# EAGLE board some other arrangement (EAGLE 6.5.0)
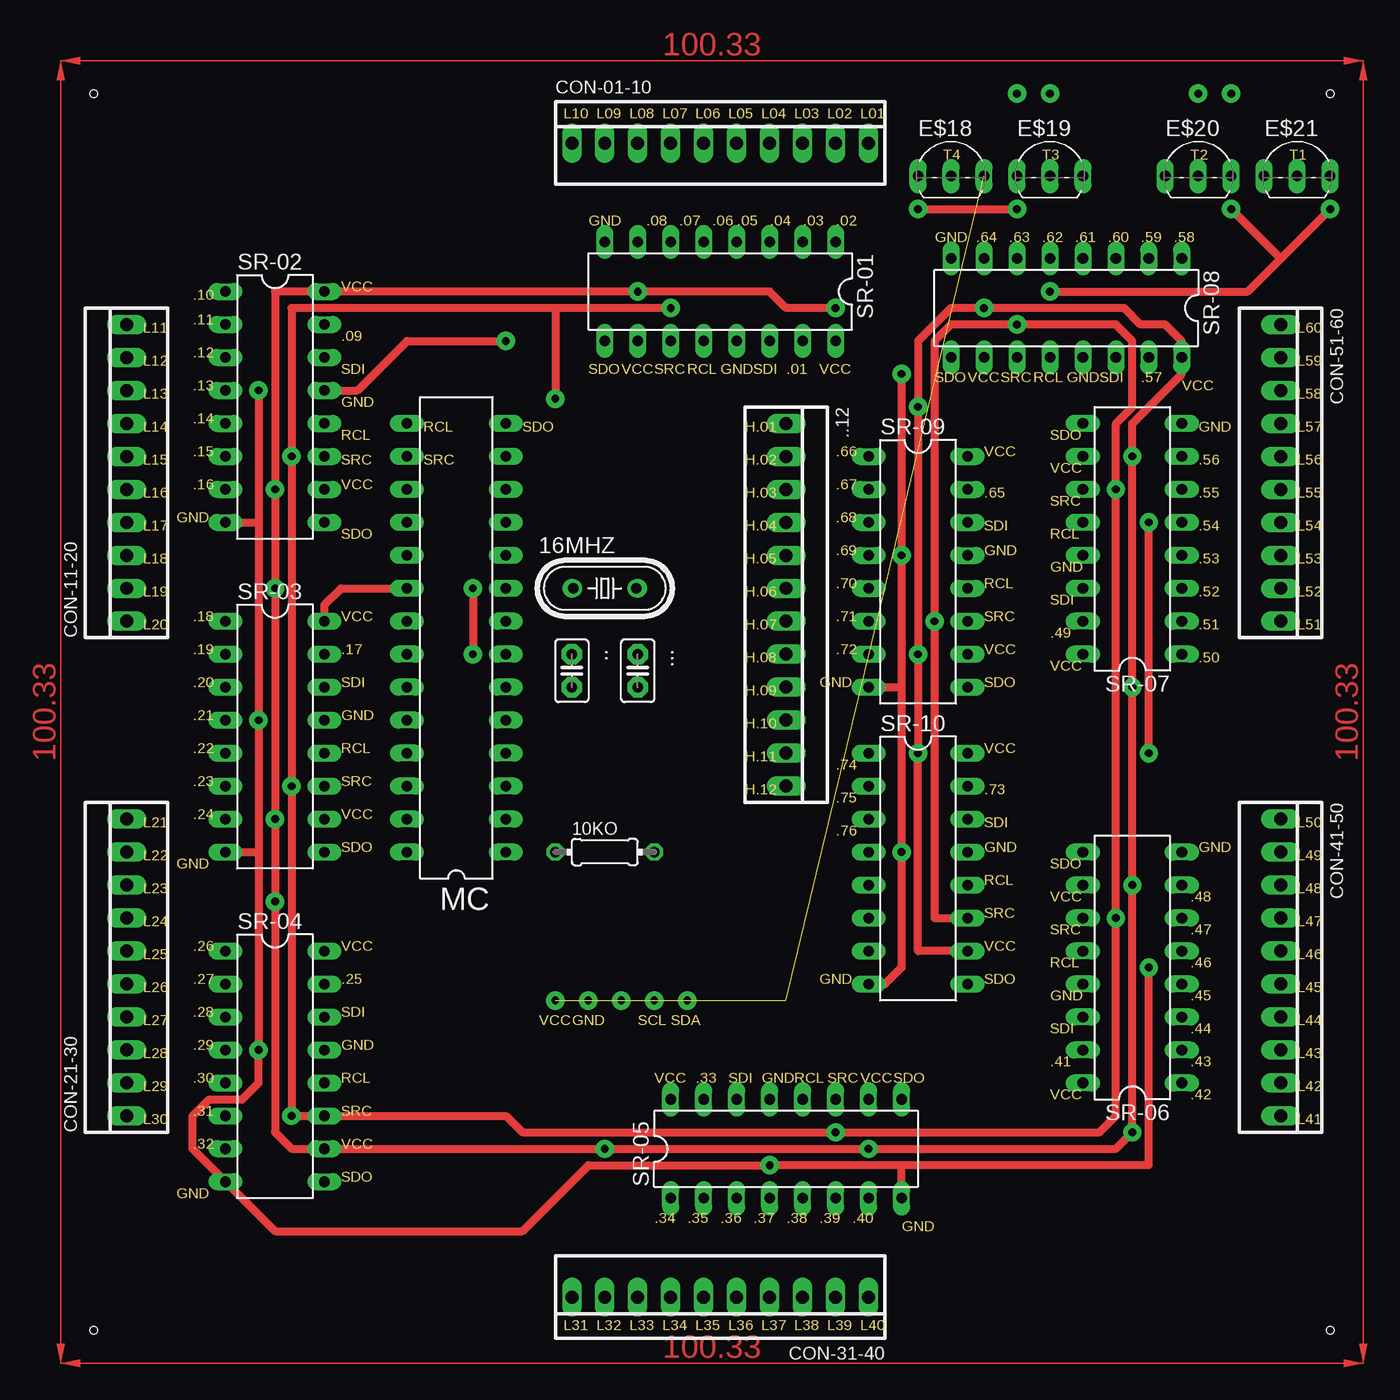
[diagram p0: board, top side]
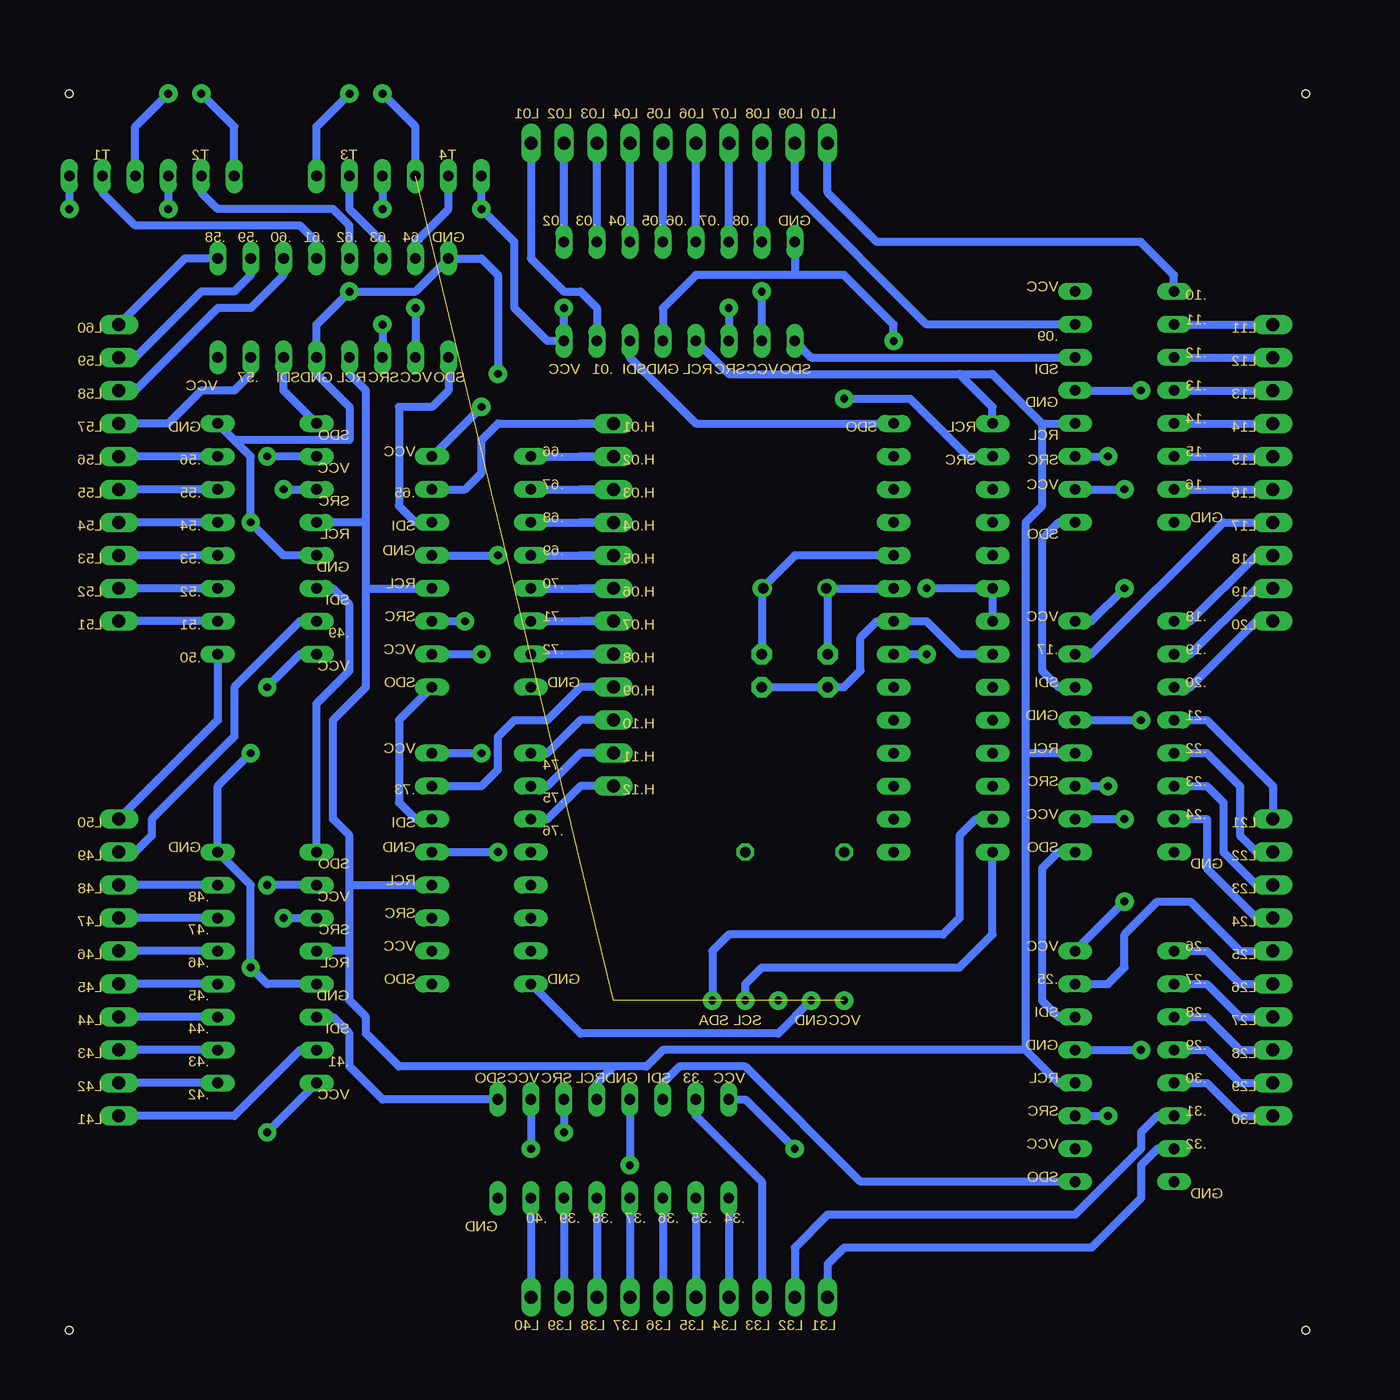
[diagram p1: board, bottom side, seen from below]

No outline drawn. Coordinates in mm, seen from the top.
Copper layers (1*16): Top 0.035mm / dielectric 1.5mm / Bottom 0.035mm
Design rules "default": minimum track width 10mil, minimum drill 24mil, track to track 8mil, track to pad 8mil, pad to pad 8mil, via to via 8mil, smd to smd 8mil, copper to edge 40mil, drill to drill 8mil, minimum pad ring 10mil, minimum via ring 8mil, stop-mask expansion 4mil, vias tented up to drill 0mil, thermal gap 10mil
Holes 0.6 mm at 2.54,2.54 97.79,2.54 97.79,97.79 2.54,97.79

## Footprints (pad centres in the part's own frame; a part is rotated, then mirrored left to right if it is on the bottom)
0204/7 = drill 0.813 octagon: 1 -3.81,0; 2 3.81,0
HC49/S = drill 0.813: 1 -2.413,0; 2 2.413,0
C2.5-2 = drill 0.813 pad 1.6 octagon: 1 -1.27,0; 2 1.27,0
22-23-2121 = drill 1 long: 1 -13.97,0; 2 -11.43,0; 3 -8.89,0; 4 -6.35,0; 5 -3.81,0; 6 -1.27,0; 7 1.27,0; 8 3.81,0; 9 6.35,0; 10 8.89,0; 11 11.43,0; 12 13.97,0
22-23-2101 = drill 1 long: 1 -11.43,0; 2 -8.89,0; 3 -6.35,0; 4 -3.81,0; 5 -1.27,0; 6 1.27,0; 7 3.81,0; 8 6.35,0; 9 8.89,0; 10 11.43,0
TO92-BCE = drill 0.813 long: B 2.54,0; C 0,0; E -2.54,0
DIL28-3 = drill 0.813 long: 1 -16.51,-3.81; 2 -13.97,-3.81; 3 -11.43,-3.81; 4 -8.89,-3.81; 5 -6.35,-3.81; 6 -3.81,-3.81; 7 -1.27,-3.81; 8 1.27,-3.81; 9 3.81,-3.81; 10 6.35,-3.81; 11 8.89,-3.81; 12 11.43,-3.81; 13 13.97,-3.81; 14 16.51,-3.81; 15 16.51,3.81; 16 13.97,3.81; 17 11.43,3.81; 18 8.89,3.81; 19 6.35,3.81; 20 3.81,3.81; 21 1.27,3.81; 22 -1.27,3.81; 23 -3.81,3.81; 24 -6.35,3.81; 25 -8.89,3.81; 26 -11.43,3.81; 27 -13.97,3.81; 28 -16.51,3.81
DIL16 = drill 0.813 long: 1 -8.89,-3.81; 2 -6.35,-3.81; 3 -3.81,-3.81; 4 -1.27,-3.81; 5 1.27,-3.81; 6 3.81,-3.81; 7 6.35,-3.81; 8 8.89,-3.81; 9 8.89,3.81; 10 6.35,3.81; 11 3.81,3.81; 12 1.27,3.81; 13 -1.27,3.81; 14 -3.81,3.81; 15 -6.35,3.81; 16 -8.89,3.81

## Placement (x,y rotation side)
10KO  [0204/7]  41.91,39.37 0 top
16MHZ  [HC49/S]  41.91,59.69 0 top
..  22 pF  [C2.5-2]  39.37,53.34 270 top
..12  [22-23-2121]  55.88,58.42 270 top
...  22 pF  [C2.5-2]  44.45,53.34 270 top
CON-01-10  [22-23-2101]  50.8,93.98 0 top
CON-11-20  [22-23-2101]  5.08,68.58 90 top
CON-21-30  [22-23-2101]  5.08,30.48 90 top
CON-31-40  [22-23-2101]  50.8,5.08 180 top
CON-41-50  [22-23-2101]  93.98,30.48 270 top
CON-51-60  [22-23-2101]  93.98,68.58 270 top
E$18  [TO92-BCE]  68.58,91.44 0 top
E$19  [TO92-BCE]  76.2,91.44 0 top
E$20  [TO92-BCE]  87.63,91.44 0 top
E$21  [TO92-BCE]  95.25,91.44 0 top
MC  [DIL28-3]  30.48,55.88 90 top
SR-01  [DIL16]  50.8,82.55 180 top
SR-02  [DIL16]  16.51,73.66 270 top
SR-03  [DIL16]  16.51,48.26 270 top
SR-04  [DIL16]  16.51,22.86 270 top
SR-05  [DIL16]  55.88,16.51 0 top
SR-06  [DIL16]  82.55,30.48 90 top
SR-07  [DIL16]  82.55,63.5 90 top
SR-08  [DIL16]  77.47,81.28 180 top
SR-09  [DIL16]  66.04,60.96 270 top
SR-10  [DIL16]  66.04,38.1 270 top

## Library data of the parts
10KO = resistor
16MHZ = crystal
.. ... = capacitor-wima
..12 CON-01-10 CON-11-20 CON-21-30 CON-31-40 CON-41-50 CON-51-60 = con-molex
E$18-E$21 = transistor-npn
MC = atmel
SR-01-SR-09 SR-10 = 74xx-eu

## Nets
S$1: CON-01-10.10 SR-01.15
S$2: CON-01-10.9 SR-01.1
S$3: CON-01-10.8 SR-01.2
S$4: CON-01-10.7 SR-01.3
S$5: CON-01-10.6 SR-01.4
S$6: CON-01-10.5 SR-01.5
S$7: CON-01-10.4 SR-01.6
S$8: CON-01-10.3 SR-01.7
S$9: CON-01-10.2 SR-02.15
S$10: CON-01-10.1 SR-02.1
S$11: CON-11-20.10 SR-02.2
S$12: CON-11-20.9 SR-02.3
S$13: CON-11-20.8 SR-02.4
S$14: CON-11-20.7 SR-02.5
S$15: CON-11-20.6 SR-02.6
S$16: CON-11-20.5 SR-02.7
S$17: CON-11-20.4 SR-03.15
S$18: CON-11-20.3 SR-03.1
S$19: CON-11-20.2 SR-03.2
S$20: CON-11-20.1 SR-03.3
S$21: CON-21-30.10 SR-03.4
S$22: CON-21-30.9 SR-03.5
S$23: CON-21-30.8 SR-03.6
S$24: CON-21-30.7 SR-03.7
S$25: CON-21-30.6 SR-04.15
S$26: CON-21-30.5 SR-04.1
S$27: CON-21-30.4 SR-04.2
S$28: CON-21-30.3 SR-04.3
S$29: CON-21-30.2 SR-04.4
S$30: CON-21-30.1 SR-04.5
S$31: CON-31-40.9 SR-04.6
S$32: CON-31-40.10 SR-04.7
S$33: CON-31-40.8 SR-05.15
S$34: CON-31-40.7 SR-05.1
S$35: CON-31-40.6 SR-05.2
S$36: CON-31-40.5 SR-05.3
S$37: CON-31-40.4 SR-05.4
S$38: CON-31-40.3 SR-05.5
S$39: CON-31-40.2 SR-05.6
S$40: CON-31-40.1 SR-05.7
S$41: CON-41-50.10 SR-06.15
S$42: CON-41-50.9 SR-06.1
S$43: CON-41-50.8 SR-06.2
S$44: CON-41-50.7 SR-06.3
S$45: CON-41-50.6 SR-06.4
S$46: CON-41-50.5 SR-06.5
S$47: CON-41-50.4 SR-06.6
S$48: CON-41-50.3 SR-06.7
S$49: E$18.E E$19.E MC.7 MC.20 MC.21 SR-01.10 SR-01.16 SR-02.10 SR-02.16 SR-03.10 SR-03.16 SR-04.16 SR-05.10 SR-05.16 SR-06.10 SR-06.16 SR-07.10 SR-07.16 SR-08.10 SR-09.10 SR-09.16 SR-10.10 SR-10.16
S$50: CON-41-50.1 SR-07.1
S$51: CON-51-60.10 SR-07.2
S$52: CON-51-60.9 SR-07.3
S$53: CON-51-60.8 SR-07.4
S$54: CON-51-60.7 SR-07.5
S$55: CON-51-60.6 SR-07.6
S$56: CON-51-60.5 SR-07.7
S$57: CON-51-60.4 SR-08.15
S$58: CON-51-60.1 SR-08.1
S$59: CON-51-60.2 SR-08.2
S$60: CON-51-60.3 SR-08.3
S$61: SR-09.15
S$62: E$18.C SR-08.7
S$63: ..12.10 SR-10.1
S$64: SR-05.9 SR-06.14
S$65: SR-01.9 SR-02.14
S$66: SR-09.1
S$67: SR-09.2
S$68: SR-09.3
S$69: SR-09.4
S$70: SR-09.5
S$71: SR-09.6
S$73: SR-02.9 SR-03.14
S$74: SR-03.9 SR-04.14
S$75: SR-04.9 SR-05.14
S$76: SR-06.9 SR-07.14
S$77: SR-07.9 SR-08.14
S$78: SR-08.9 SR-09.14
S$79: SR-09.9 SR-10.14
S$80: MC.15 SR-02.12 SR-03.12 SR-04.12 SR-05.12 SR-06.12 SR-07.12 SR-08.12 SR-09.12 SR-10.12
S$81: MC.16 SR-01.11 SR-02.11 SR-03.11 SR-04.11 SR-05.11 SR-06.11 SR-07.11 SR-08.11 SR-09.11 SR-10.11
S$84: E$19.C SR-08.6
S$86: E$20.C SR-08.5
S$88: E$21.C SR-08.4
S$89: ..12.11 SR-10.2
S$90: ..12.12 SR-10.3
S$91: SR-01.8 SR-01.13
S$93: SR-02.8 SR-03.13
S$94: CON-41-50.2 SR-07.15
S$96: E$19.B
S$98: E$20.E
S$99: E$21.E
S$100: ..12.9 SR-10.15
S$101: SR-02.13
S$103: SR-09.7
S$104: ...1 MC.9
S$105: ....1 MC.10
S$106: ...2 ....2 MC.8 MC.22
S$107: E$18.B E$20.B E$21.B MC.27 MC.28 SR-03.8 SR-04.8 SR-04.13 SR-05.8 SR-05.13 SR-06.8 SR-06.13 SR-07.8 SR-07.13 SR-08.8 SR-08.13 SR-09.8 SR-09.13 SR-10.8 SR-10.13
S$108: MC.14 SR-01.14

## Tracks (layer width: path | path; a pad name or v marks a point on that pad's centre or on a via)
S$1
  Bottom 0.61: CON-01-10.10 62.23,85.09 59.69,82.55 58.42,82.55 57.15,81.28 SR-01.15
S$2
  Bottom 0.61: SR-01.1 CON-01-10.9
S$3
  Bottom 0.61: SR-01.2 CON-01-10.8
S$4
  Bottom 0.61: SR-01.3 CON-01-10.7
S$5
  Bottom 0.61: SR-01.4 CON-01-10.6
S$6
  Bottom 0.61: SR-01.5 CON-01-10.5
S$7
  Bottom 0.61: SR-01.6 CON-01-10.4
S$8
  Bottom 0.61: SR-01.7 CON-01-10.3
S$9
  Bottom 0.61: SR-02.15 31.75,80.01 41.91,90.17 CON-01-10.2
S$10
  Bottom 0.61: SR-02.1 12.7,83.82 15.24,86.36 35.56,86.36 39.37,90.17 CON-01-10.1
S$11
  Bottom 0.61: SR-02.2 CON-11-20.10
S$12
  Bottom 0.61: SR-02.3 CON-11-20.9
S$13
  Bottom 0.61: SR-02.4 CON-11-20.8
S$14
  Bottom 0.61: SR-02.5 CON-11-20.7
S$15
  Bottom 0.61: SR-02.6 CON-11-20.6
S$16
  Bottom 0.61: SR-02.7 CON-11-20.5
S$17
  Bottom 0.61: SR-03.15 19.05,54.61 8.89,64.77 CON-11-20.4
S$18
  Bottom 0.61: SR-03.1 11.43,57.15 6.35,62.23 CON-11-20.3
S$19
  Bottom 0.61: SR-03.2 11.43,54.61 6.35,59.69 CON-11-20.2
S$20
  Bottom 0.61: SR-03.3 11.43,52.07 6.35,57.15 CON-11-20.1
S$21
  Bottom 0.61: SR-03.4 10.16,49.53 5.08,44.45 CON-21-30.10
S$22
  Bottom 0.61: SR-03.5 10.16,46.99 7.62,44.45 7.62,40.64 6.35,39.37 CON-21-30.9
S$23
  Bottom 0.61: SR-03.6 10.16,44.45 8.89,43.18 8.89,39.37 6.35,36.83 CON-21-30.8
S$24
  Bottom 0.61: SR-03.7 10.16,41.91 10.16,38.1 6.35,34.29 CON-21-30.7
S$25
  Bottom 0.61: SR-04.15 17.78,29.21 16.51,30.48 16.51,33.02 13.97,35.56 11.43,35.56 7.62,31.75 CON-21-30.6
S$26
  Bottom 0.61: SR-04.1 10.16,31.75 7.62,29.21 CON-21-30.5
S$27
  Bottom 0.61: SR-04.2 10.16,29.21 7.62,26.67 CON-21-30.4
S$28
  Bottom 0.61: SR-04.3 10.16,26.67 7.62,24.13 CON-21-30.3
S$29
  Bottom 0.61: SR-04.4 10.16,24.13 7.62,21.59 CON-21-30.2
S$30
  Bottom 0.61: SR-04.5 10.16,21.59 7.62,19.05 CON-21-30.1
S$31
  Bottom 0.61: SR-04.6 13.97,19.05 15.24,17.78 15.24,16.51 20.32,11.43 39.37,11.43 41.91,8.89 CON-31-40.9
S$32
  Bottom 0.61: SR-04.7 13.97,16.51 15.24,15.24 15.24,12.7 19.05,8.89 38.1,8.89 39.37,7.62 CON-31-40.10
S$33
  Bottom 0.61: SR-05.15 49.53,19.05 44.45,13.97 CON-31-40.8
S$34
  Bottom 0.61: SR-05.1 CON-31-40.7
S$35
  Bottom 0.61: SR-05.2 CON-31-40.6
S$36
  Bottom 0.61: SR-05.3 CON-31-40.5
S$37
  Bottom 0.61: SR-05.4 CON-31-40.4
S$38
  Bottom 0.61: SR-05.5 CON-31-40.3
S$39
  Bottom 0.61: SR-05.6 CON-31-40.2
S$40
  Bottom 0.61: SR-05.7 CON-31-40.1
S$41
  Bottom 0.61: SR-06.15 80.01,24.13 85.09,19.05 CON-41-50.10
S$42
  Bottom 0.61: SR-06.1 CON-41-50.9
S$43
  Bottom 0.61: SR-06.2 CON-41-50.8
S$44
  Bottom 0.61: SR-06.3 CON-41-50.7
S$45
  Bottom 0.61: SR-06.4 CON-41-50.6
S$46
  Bottom 0.61: SR-06.5 CON-41-50.5
S$47
  Bottom 0.61: SR-06.6 CON-41-50.4
S$48
  Bottom 0.61: SR-06.7 CON-41-50.3
S$49  (via drill 0.6 pad 1.42)
  Top 0.61: v59.69,81.28 55.88,81.28 54.61,82.55 v44.45,82.55 SR-02.16 16.51,82.55 v16.51,67.31 v16.51,59.69 v16.51,41.91 v16.51,35.56 16.51,17.78 17.78,16.51 v41.91,16.51 v62.23,16.51 81.28,16.51 v82.55,17.78 v82.55,36.83 v82.55,52.07 v82.55,69.85 82.55,72.39 86.36,76.2 86.36,78.74 85.09,80.01 83.19,80.01 81.92,81.28 v71.12,81.28 68.58,81.28 66.04,78.74 v66.04,73.66 v66.04,54.61 v66.04,46.99 66.04,31.75 SR-10.10 | v66.04,88.9 v73.66,88.9 | SR-03.16 20.32,58.42 21.59,59.69 MC.20 | v31.75,59.69 v31.75,54.61
  Bottom 0.61: v59.69,81.28 SR-01.16 60.96,78.74 63.5,81.28 63.5,86.36 v66.04,88.9 E$18.E | SR-01.10 v44.45,82.55 | SR-02.10 v16.51,67.31 | SR-03.16 19.05,57.15 v16.51,59.69 | SR-03.10 v16.51,41.91 | SR-04.16 v16.51,35.56 | SR-05.16 45.72,20.32 v41.91,16.51 | SR-05.10 v62.23,16.51 | SR-06.16 v82.55,17.78 | SR-06.10 v82.55,36.83 | SR-07.16 80.01,54.61 v82.55,52.07 | SR-07.10 v82.55,69.85 | v71.12,81.28 SR-08.10 | SR-09.16 v66.04,73.66 | SR-09.10 v66.04,54.61 | SR-10.16 v66.04,46.99 | E$19.E v73.66,88.9 | MC.21 MC.20 v31.75,59.69 | MC.7 v31.75,54.61
S$50
  Bottom 0.61: SR-07.1 86.36,49.53 CON-41-50.1
S$51
  Bottom 0.61: SR-07.2 CON-51-60.10
S$52
  Bottom 0.61: SR-07.3 CON-51-60.9
S$53
  Bottom 0.61: SR-07.4 CON-51-60.8
S$54
  Bottom 0.61: SR-07.5 CON-51-60.7
S$55
  Bottom 0.61: SR-07.6 CON-51-60.6
S$56
  Bottom 0.61: SR-07.7 CON-51-60.5
S$57
  Bottom 0.61: SR-08.15 83.82,76.2 85.09,74.93 87.63,74.93 90.17,72.39 CON-51-60.4
S$58
  Bottom 0.61: SR-08.1 88.9,85.09 CON-51-60.1
S$59
  Bottom 0.61: SR-08.2 83.82,83.82 85.09,82.55 87.63,82.55 92.71,77.47 CON-51-60.2
S$60
  Bottom 0.61: SR-08.3 81.28,83.82 83.82,81.28 86.36,81.28 92.71,74.93 CON-51-60.3
S$61
  Bottom 0.61: SR-09.15 67.31,67.31 66.04,68.58 66.04,71.12 64.77,72.39 55.88,72.39 58.42,72.39
S$62
  Bottom 0.61: SR-08.7 71.12,86.36 68.58,88.9 E$18.C
S$63
  Bottom 0.61: SR-10.1 60.96,46.99 58.42,49.53 ..12.10
S$64
  Bottom 0.61: SR-05.9 73.66,20.32 76.2,22.86 76.2,25.4 77.47,26.67 SR-06.14
S$65
  Bottom 0.61: SR-01.9 40.64,77.47 SR-02.14
S$66
  Bottom 0.61: SR-09.1 55.88,69.85 58.42,69.85
S$67
  Bottom 0.61: SR-09.2 55.88,67.31 58.42,67.31
S$68
  Bottom 0.61: SR-09.3 55.88,64.77 58.42,64.77
S$69
  Bottom 0.61: SR-09.4 55.88,62.23 58.42,62.23
S$70
  Bottom 0.61: SR-09.5 55.88,59.69 58.42,59.69
S$71
  Bottom 0.61: SR-09.6 55.88,57.15 58.42,57.15
S$73
  Bottom 0.61: SR-02.9 21.59,64.77 22.86,63.5 22.86,53.34 21.59,52.07 SR-03.14
S$74
  Bottom 0.61: SR-03.9 21.59,39.37 22.86,38.1 22.86,27.94 21.59,26.67 SR-04.14
S$75
  Bottom 0.61: SR-04.9 36.83,13.97 45.72,22.86 50.8,22.86 52.07,21.59 SR-05.14
S$76
  Bottom 0.61: SR-06.9 78.74,50.8 76.2,53.34 76.2,58.42 77.47,59.69 SR-07.14
S$77
  Bottom 0.61: SR-07.9 81.28,74.93 SR-08.14
S$78
  Bottom 0.61: SR-08.9 68.58,74.93 69.85,73.66 72.39,73.66 72.39,66.04 71.12,64.77 SR-09.14
S$79
  Bottom 0.61: SR-09.9 72.39,49.53 72.39,43.18 71.12,41.91 SR-10.14
S$80
  Bottom 0.61: 49.53,78.74 46.99,76.2 29.21,76.2 | 29.21,76.2 26.67,76.2 22.86,72.39 | 22.86,72.39 SR-02.12 | 22.86,72.39 22.86,66.04 24.13,64.77 24.13,46.99 | 24.13,46.99 SR-03.12 | 24.13,46.99 24.13,24.13 | 24.13,24.13 21.59,21.59 SR-04.12 | 24.13,24.13 52.07,24.13 53.34,22.86 55.88,22.86 | 55.88,22.86 57.15,21.59 SR-05.12 | 55.88,22.86 72.39,22.86 74.93,25.4 74.93,26.67 76.2,27.94 76.2,31.75 | 76.2,31.75 SR-06.12 | 76.2,31.75 76.2,36.83 | 76.2,36.83 76.2,40.64 77.47,41.91 77.47,49.53 74.93,52.07 74.93,59.69 | 74.93,59.69 74.93,64.77 | 74.93,64.77 SR-07.12 | 74.93,64.77 74.93,74.93 76.2,76.2 SR-08.12 | 74.93,59.69 SR-09.12 | 76.2,36.83 SR-10.12 | MC.15 26.67,73.66 29.21,76.2
S$81  (via drill 0.6 pad 1.42)
  Top 0.61: v46.99,81.28 38.1,81.28 | 38.1,81.28 17.78,81.28 v17.78,69.85 v17.78,44.45 v17.78,19.05 34.29,19.05 35.56,17.78 v59.69,17.78 80.01,17.78 81.28,19.05 v81.28,34.29 v81.28,67.31 81.28,72.39 82.55,73.66 82.55,78.74 81.28,80.01 v73.66,80.01 68.58,80.01 67.31,78.74 v67.31,57.15 67.31,34.29 SR-10.11 | 38.1,81.28 v38.1,74.3
  Bottom 0.61: v46.99,81.28 SR-01.11 | SR-02.11 v17.78,69.85 | SR-03.11 v17.78,44.45 | SR-04.11 v17.78,19.05 | SR-05.11 v59.69,17.78 | v81.28,34.29 SR-06.11 | v81.28,67.31 SR-07.11 | v73.66,80.01 SR-08.11 | SR-09.11 v67.31,57.15 | v38.1,74.3 33.02,74.3 28.57,69.85 MC.16
S$84
  Bottom 0.61: SR-08.6 73.66,86.36 76.2,88.9 E$19.C
S$86
  Bottom 0.61: SR-08.5 76.2,87.63 77.47,88.9 86.36,88.9 87.63,90.17 E$20.C
S$88
  Bottom 0.61: SR-08.4 78.74,86.36 80.01,87.63 92.71,87.63 95.25,90.17 E$21.C
S$89
  Bottom 0.61: SR-10.2 60.96,44.45 58.42,46.99 ..12.11
S$90
  Bottom 0.61: SR-10.3 60.96,41.91 58.42,44.45 ..12.12
S$91  (via drill 0.6 pad 1.42)
  Top 0.61: v34.29,78.74 26.67,78.74 22.86,74.93 20.32,74.93
  Bottom 0.61: v34.29,78.74 34.29,80.01 38.1,83.82 41.91,83.82 | 41.91,83.82 49.53,83.82 52.07,81.28 SR-01.13 | SR-01.8 41.91,83.82
S$93  (via drill 0.6 pad 1.42)
  Top 0.61: v15.24,74.93 15.24,64.77 | 15.24,64.77 v15.24,49.53 | SR-02.8 15.24,64.77
  Bottom 0.61: SR-03.13 v15.24,49.53
S$94
  Bottom 0.61: SR-07.15 80.01,57.15 85.09,52.07 85.09,48.26 91.44,41.91 91.44,40.64 92.71,39.37 CON-41-50.2
S$96  (via drill 0.6 pad 1.42)
  Bottom 0.61: E$19.B 78.74,95.25 v76.2,97.79
S$98  (via drill 0.6 pad 1.42)
  Bottom 0.61: E$20.E 85.09,95.25 v87.63,97.79
S$99  (via drill 0.6 pad 1.42)
  Bottom 0.61: E$21.E 92.71,95.25 v90.17,97.79
S$100
  Bottom 0.61: SR-10.15 66.04,44.45 64.77,45.72 64.77,48.26 63.5,49.53 60.96,49.53 58.42,52.07 ..12.9
S$101
  Bottom 0.61: SR-02.13 15.24,74.93
S$103
  Bottom 0.61: SR-09.7 55.88,54.61 58.42,54.61
S$104  (via drill 0.6 pad 1.42)
  Bottom 0.61: MC.9 v39.37,59.69 ...1
S$105  (via drill 0.6 pad 1.42)
  Bottom 0.61: MC.10 41.91,62.23 v44.45,59.69 ....1
S$106
  Bottom 0.61: ....2 ...2 38.1,52.07 36.83,53.34 36.83,55.88 35.56,57.15 MC.8 31.75,57.15 29.21,54.61 MC.22
S$107  (via drill 0.6 pad 1.42)  (8 unrouted)
  Top 0.61: 64.77,52.07 v64.77,62.23 v64.77,76.2 | 64.77,52.07 v64.77,39.37 64.77,30.48 63.5,29.21 SR-10.8 | v83.82,30.48 83.82,15.24 64.77,15.24 | v83.82,46.99 v83.82,64.77 | v76.2,82.55 91.44,82.55 93.98,85.09 | 93.98,85.09 v97.79,88.9 | 93.98,85.09 v90.17,88.9 | SR-09.8 64.77,52.07 | 64.77,15.24 v54.61,15.24 40.64,15.24 35.56,10.16 16.51,10.16 SR-04.8 10.16,16.51 10.16,19.05 11.43,20.32 13.97,20.32 15.24,21.59 v15.24,24.13 15.24,39.37 | SR-05.8 64.77,15.24 | 15.24,49.53 15.24,39.37 | SR-03.8 15.24,39.37
  Bottom 0.61: MC.27 27.94,41.91 29.21,40.64 29.21,34.29 30.48,33.02 46.99,33.02 48.26,31.75 v48.26,27.94 | E$18.B 71.12,95.25 v73.66,97.79 | v45.72,27.94 45.72,29.21 44.45,30.48 29.21,30.48 26.67,33.02 MC.28 | v40.64,27.94 43.18,25.4 58.42,25.4 SR-10.8 | SR-10.13 v64.77,39.37 | SR-06.13 82.55,29.21 v83.82,30.48 83.82,36.83 SR-06.8 86.36,44.45 v83.82,46.99 | SR-07.13 81.28,62.23 v83.82,64.77 83.82,69.85 85.09,71.12 | 85.09,71.12 SR-07.8 | 85.09,71.12 76.2,71.12 76.2,73.66 78.74,76.2 SR-08.13 78.74,80.01 v76.2,82.55 71.12,82.55 SR-08.8 66.04,85.09 64.77,83.82 v64.77,76.2 | SR-09.13 v64.77,62.23 | E$21.B v97.79,88.9 | E$20.B v90.17,88.9 | SR-05.13 v54.61,15.24 | SR-04.13 v15.24,24.13
  other vias: 43.18,27.94 38.1,27.94
S$108
  Bottom 0.61: SR-01.14 54.61,77.47 49.53,72.39 MC.14
(copper drawn outside any net)
  shapes: Top area x4

## Text on the board
Dimension: L10 | L09 | L08 | L07 | L06 | L05 | L04 | L03 | L02 | L01 | T4 | T3 | T2 | T1 | GND | .08 | .07 | .06 | .05 | .04 | .03 | .02 | GND | .64 | .63 | .62 | .61 | .60 | .59 | .58 | VCC | .10 | .11 | L11 | .09 | L60 | L12 | .12 | L59 | SDI | SDO | VCC | SRC | RCL | GND | SDI | .01 | VCC | SDO | VCC | SRC | RCL | GND | SDI | .57 | .13 | VCC | L13 | GND | L58 | L14 | .14 | RCL | SDO | H.01 | GND | L57 | RCL | SDO | .15 | .66 | VCC | L15 | SRC | SRC | H.02 | VCC | .56 | L56 | L16 | .16 | VCC | H.03 | .67 | .65 | .55 | L55 | SRC | GND | .68 | L17 | SDO | H.04 | SDI | RCL | .54 | L54 | L18 | H.05 | .69 | GND | .53 | L53 | GND | .70 | RCL | L19 | H.06 | .52 | L52 | SDI | L20 | .18 | VCC | H.07 | .71 | SRC | .51 | L51 | .49 | .19 | .17 | .72 | VCC | H.08 | .50 | VCC | .20 | SDI | GND | SDO | H.09 | .21 | GND | H.10 | .22 | RCL | VCC | H.11 | .74 | .23 | SRC | H.12 | .73 | .75 | .24 | VCC | L21 | .76 | SDI | L50 | L22 | SDO | GND | GND | L49 | GND | SDO | RCL | L23 | VCC | .48 | L48 | L24 | SRC | L47 | SRC | .47 | .26 | VCC | VCC | L25 | L46 | RCL | .46 | L26 | .27 | .25 | GND | SDO | L45 | GND | .45 | .28 | SDI | L27 | VCC | GND | SCL | SDA | L44 | SDI | .44 | .29 | GND | L28 | .41 | .43 | L43 | .30 | RCL | VCC | .33 | SDI | GND | RCL | SRC | VCC | SDO | L29 | L42 | VCC | .42 | .31 | SRC | L30 | L41 | .32 | VCC | SDO | GND | .34 | .35 | .36 | .37 | .38 | .39 | .40 | GND | L31 | L32 | L33 | L34 | L35 | L36 | L37 | L38 | L39 | L40